# Altium PCB Booster_PA_OUT.PcbDoc (part 2 of 2)
Units mil, origin at the board's own origin, x right, y up, seen from the top; angles counter-clockwise.
Board outline 3129.92 x 1141.73 mil, 2 copper layers (Top Layer, Bottom Layer), stack 42.17 mil thick; 98 components, 62 nets, 277 pads, 322 vias.
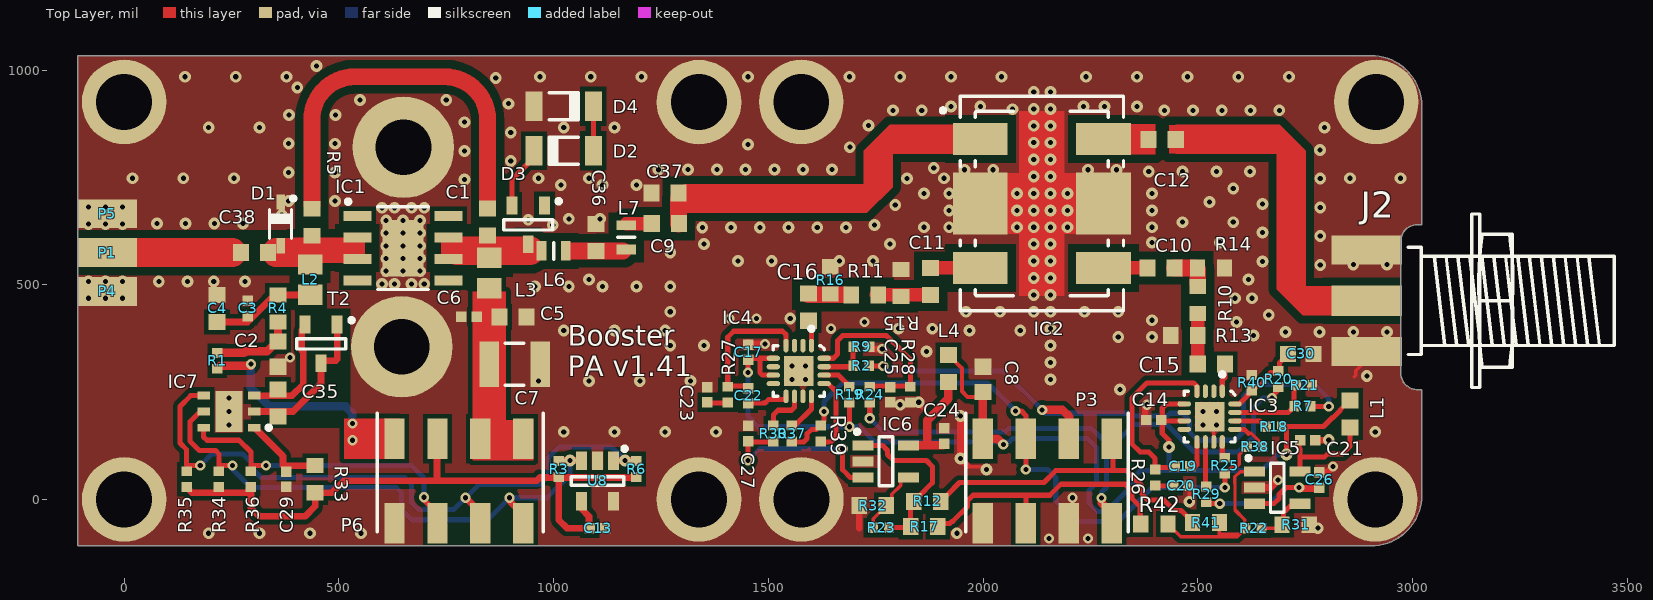
[diagram p0: Top Layer view]

## Via types
v1: diameter 27.56, hole 11.81, Top Layer to Bottom Layer, tented both sides, 283 vias
v2: diameter 23.62, hole 11.81, Top Layer to Bottom Layer, tented both sides, 39 vias

## Nets (pads, with @x,y where several pads share a name; then routed paths per layer and width w, separated by ;. In a path a pad name is that pad's centre, name@x,y a point inside that pad or via, vN(x,y) a via of type N, cw(c..) or ccw(c..) an arc to the next point about the centre after c; other vN are vias at no path point) (continued)
NetC22_1: (continued)
  Top Layer w11.81: C22.1@1452.76,224.41 1492.13,224.41 1500,232.28 1541.34,232.28 IC4.9@1541.34,242.13
NetC22_2: C22.2 IC4.4 R27.1 | length 333.8
  Top Layer w11.81: C22.2@1452.76,263.78 1405.51,263.78 1405.51,377.95 1419.29,391.73 1533.46,391.73 1541.34,383.86 IC4.4@1541.34,356.3
NetC23_1: C23.1 R27.2 | length 47.2
  Top Layer w11.81: C23.1@1358.27,224.41 R27.2@1405.51,224.41
NetC24_2: C24.2 IC6.5 L4.1 | length 257
  Top Layer w19.68: IC6.5@1820.87,125.98 1870.08,125.98 ; C24.2@1909.45,127.95 1907.48,125.98 1870.08,125.98 ; L4.1@1919.15,273.23 1919.15,234.49 1895.67,211.01 1895.67,209.76 1870.08,184.17 1870.08,125.98
NetC25_2: C25.2 IC4.16 R24.2 R28.1 | length 423.5
  Top Layer w11.81: IC4.16@1627.95,328.74 1651.57,328.74 1661.42,338.58 1661.42,370.08 1673.23,381.89 1774.36,381.89 1790.1,366.14 1791.34,366.14 1830.71,326.77 1830.71,263.78 1783.46,263.78 R24.2@1736.22,263.78
NetC26_2: C26.2 IC5.3 R29.1 | length 442.2
  Top Layer w11.81: R29.1@2519.68,-7.87 2521.65,-9.84 v2(2551.18,-9.84) ; IC5.3@2637.8,-9.84 2677.28,-9.84 2688.98,1.85 2688.98,11.28 2697.48,19.78 2697.53,19.78 2705.31,27.56 v2(2736.22,27.56) ; v2(2736.22,27.56) 2775.59,27.56 2779.53,23.62 2740.16,23.62 v2(2736.22,27.56)
  Bottom Layer w11.81: v2(2551.18,-9.84) 2667.91,-9.84 2705.31,27.56 v2(2736.22,27.56)
NetC27_2: C27.2 IC6.3 R30.1 | length 443.9
  Top Layer w11.81: v2(1452.76,90.55) 1452.76,133.86 R30.1@1511.81,133.86 ; v2(1673.22,118.11) 1673.22,68.9 1690.94,51.18 IC6.3@1726.38,51.18
  Bottom Layer w11.81: v2(1452.76,90.55) 1480.31,118.11 v2(1673.22,118.11)
NetC29_2: C29.2 IC7.1 R33.1 | length 191.5
  Top Layer w15.75: IC7.1@303.15,167.72 370.08,100.79 370.08,78.74 R33.1
NetC30_2: C30.2 IC3.16 R20.2 R40.1 | length 191.4
  Top Layer w11.81: IC3.16@2584.65,222.44 IC3.16 2596.46,222.44 R40.1@2629.92,255.91 ; R40.1@2625.98,255.91 R40.1@2629.92,255.91 ; R20.2@2685.04,298.79 2685.04,295.28 2669.29,295.28 2653.67,279.65 2653.67,273.77 2645.52,265.62 2639.64,265.62 R40.1@2629.92,255.91 ; R20.2 2690.85,302.63 2690.85,319.18 C30.2
NetC35_2: C35.2 IC7.3 T2.2 | length 263.7
  Top Layer w15.75: IC7.3@303.15,241.73 391.34,241.73 417.32,267.72 417.32,343.75 413.39,347.69 413.39,393.7 T2.2@421.26,401.57
NetC36_2: C36.2 L6.2 L7.1 | length 122.2
  Top Layer w39.37: 1039.37,578.88 1098.28,578.88 C36.2 1098.57,578.88 L7.1@1161.42,578.88
NetC38_1: C38.1 D1.2 IC1.2 IC1.3 L2.2 R5.1 | length 68.9
  Top Layer w66.93: D1.2@354.33,574.8 423.23,574.8
NetC38_2: C38.2 P1.1 | length 291.3
  Top Layer w66.93: P1.1 251.97,574.8
NetD2_1: D2.1 D3.2 | length 148.2
  Top Layer w11.81: D3.2 903.62,745.74 924.04,766.16 954.72,796.85 D2.1
NetD2_2: D2.2 D4.1 | length 103.7
  Top Layer w11.81: D2.2 D4.1
NetIC3_10: IC3.10 R29.2 | length 107.1
  Top Layer w11.81: R29.2@2517.72,31.5 IC3.10@2517.72,135.83 ; R29.2@2519.68,31.5 R29.2@2521.65,33.46
NetIC3_12: IC3.12 R25.2 | length 39.8
  Top Layer w11.81: IC3.12@2557.09,135.83 2557.09,104.33 R25.2@2562.99,98.43
NetIC3_13: IC3.13 R38.2 | length 86.7
  Top Layer w8: 2617.76,153.9 2624.92,153.9 2644.13,134.69 2644.13,129.84 R38.2
  Top Layer w11.81: IC3.13@2584.65,163.39 2608.27,163.39 2617.76,153.9
NetIC3_14: IC3.14 R18.2 | length 67.4
  Top Layer w11.81: IC3.14@2584.65,183.07 2643.7,183.07 R18.2@2649.61,177.17
NetIC3_15: IC3.15 R7.1 R21.2 | length 189.4
  Top Layer w11.81: IC3.15@2584.65,202.76 2710.63,202.76 2724.41,216.54 2724.41,258.27 R21.2@2725.98,259.84
NetIC4_10: IC4.10 R30.2 | length 107.7
  Top Layer w11.81: R30.2@1511.81,173.23 1511.81,196.85 1522.64,207.68 1554.13,207.68 1561.02,214.57 IC4.10@1561.02,242.13
NetIC4_12: IC4.12 R37.2 | length 88.3
  Top Layer w11.81: R37.2@1559.06,173.23 1562.99,173.23 1600.39,210.63 IC4.12@1600.39,242.13
NetIC4_13: IC4.13 R39.2 | length 183.5
  Top Layer w11.81: R39.2@1622.05,133.86 1645.67,133.86 1657.48,145.67 1657.48,251.97 1639.76,269.68 IC4.13@1627.95,269.68
NetIC4_14: IC4.14 R19.1 | length 71.6
  Top Layer w11.81: IC4.14@1627.95,289.37 1663.39,289.37 R19.1@1688.98,263.78
NetIC4_15: IC4.15 R2.1 R9.2 | length 109.7
  Top Layer w11.81: IC4.15@1627.95,309.06 1694.88,309.06 1696.85,311.02 1696.85,348.82 R9.2@1698.43,350.39
NetIC5_1: IC5.1 R22.1 R41.2 R42.2 | length 463.1
  Top Layer w8: R42.2 2430.5,-58.97 2444.21,-72.69 2446.18,-72.69 2460.11,-86.61 2591.73,-86.61 2597.33,-81.02 ; R41.2 2550.5,-81.02 2597.33,-81.02 ; IC5.1@2637.8,64.96 IC5.1 2598.72,64.96 2586.61,52.86 2586.61,37.61 2586.8,37.42 2586.8,-24.62 2609.6,-47.41 2609.6,-65.11 R22.1 2611.42,-67.72 2604,-75.13 2603.21,-75.13 2597.33,-81.02
NetIC5_4: IC5.4 R22.2 R31.2 | length 120.8
  Top Layer w8: R22.2 2688.57,-66.93 R31.2
  Top Layer w11.81: R31.2@2699.98,-59 2699.98,-30.34 2720.47,-9.84 IC5.4@2732.28,-9.84
NetIC6_1: IC6.1 R12.1 R17.1 R23.1 | length 413.5
  Top Layer w11.81: IC6.1@1726.38,125.98 1765.75,125.98 1777.56,114.17 1777.56,104.87 1791.87,90.55 1868.11,90.55 1881.89,76.77 1881.89,38.98 1852.36,9.45 1850.39,9.45 1838.58,-2.36 R12.1 1831.56,-11.35 R17.1@1831.56,-53.37 ; R23.1 1828.98,-65.67 R17.1 R17.1@1831.56,-53.37 ; R17.1@1821.97,-62.96 R17.1@1831.56,-53.37 ; R17.1@1833.78,-49.18 1833.78,-51.15 R17.1@1831.56,-53.37
NetIC6_4: IC6.4 R23.2 R32.2 | length 161.5
  Top Layer w8: R23.2 1743.95,-45.11 1759.14,-29.93 1761.11,-29.93 1774.82,-16.21 R32.2 1787.27,-1.79 1787.27,11.68 1808.08,32.49 1808.08,43.37 1815.89,51.18 IC6.4
  Top Layer w11.81: R32.2@1763.01,-14.24 R32.2@1764.98,-12.27
OUT_BIAS: P6.8 R1.2 | length 566.2
  Top Layer w19.68: R1.2 217.32,304.33 224.02,311.02 v2@295.28,311.02 ; v2(531.5,177.17) v2(531.5,137.8) 598.03,137.8
  Bottom Layer w19.68: v2(295.28,314.96) 295.28,259.84 338.58,216.54 515.75,216.54 531.5,200.79 v2(531.5,177.17) v2(531.5,137.8)
P3V3: C13.2 P6.6 R3.1 R6.1 R33.2 R34.1 R35.1 R36.1 U8.4 | length 1493.9
  Top Layer w15.75: R35.1@145.67,27.56 157.48,15.75 295.28,15.75 295.28,-19.69 314.96,-39.37 421.26,-39.37 444.88,-15.75 R33.2 484.25,15.75 511.81,43.31 728.35,43.31 ; P6.6@728.35,137.8 728.35,43.31 ; U8.4 1064.96,-21.65 1082.68,-39.37 1082.68,-66.93 1031.5,-66.93 1011.81,-47.24 R3.1@1011.81,51.18 ; R6.1@1192.91,51.18 R3.1@1011.81,51.18 ; 728.35,43.31 960.63,43.31 968.5,51.18 R3.1@1011.81,51.18
P3V3A: C8.2 C14.2 C17.2 IC3.5 IC3.7 IC4.5 IC4.7 L1.2 L4.2 P3.8 R18.1 R19.2 | length 2665
  Top Layer w10: L4.2@1919.15,337.01 1950.96,305.2 1950.96,251.8 1963.98,238.78 1999.61,238.78 C8.2@2000,239.17
  Top Layer w11.81: v2(1452.76,295.28) C17.2 1452.76,326.77 1454.72,328.74 1480.32,328.74 ; IC4.7@1513.78,289.37 IC4.7 1486.22,289.37 1480.32,295.28 1480.32,328.74 ; IC4.5@1513.78,328.74 IC4.5 1480.32,328.74 ; v2(1688.98,169.29) R19.2@1688.98,224.41 ; v1(2433.07,122.05) 2433.07,137.8 2417.32,153.54 C14.2@2417.32,185.04 ; IC3.7@2470.47,183.07 IC3.7 2419.29,183.07 C14.2@2417.32,185.04 ; IC3.5@2470.47,222.44 IC3.5 2427.17,222.44 2417.32,212.6 C14.2@2417.32,185.04 ; v1(2706.69,104.33) 2706.69,159.45 2696.85,169.29 2697.24,169.68 2792.91,169.68 2814.05,190.82 2815.77,190.82 2830.83,205.88 2830.83,207.61 2854.33,231.1 L1.2@2854.33,222.33
  Top Layer w19.68: C8.2@1999.61,238.78 P3.8 2033.46,141.73 v2(2047.24,127.95)
  Bottom Layer w11.81: v2(1452.76,295.28) 1452.76,192.91 1476.38,169.29 v2(1688.98,169.29) 1712.6,169.29 1748.03,133.86 2060.97,133.86 2068.84,141.73 2243.13,141.73 2263.78,121.09 2263.78,37.74 2246.46,20.42 2246.46,-8.69 2265.33,-27.56 2287.4,-27.56 2350.39,35.43 2350.39,51.18 2366.14,66.93 2433.07,66.93 ; v1(2433.07,122.05) 2433.07,66.93 ; v1(2706.69,104.33) 2685.04,104.33 2647.64,66.93 2433.07,66.93
RET_VRMS: P3.2 R12.2 R41.1 | length 755.3
  Top Layer w11.81: R12.2 1901.57,-2.36 1913.39,9.45 1915.35,9.45 1945.28,39.37 2141.73,39.37 2169.29,66.93 2303.15,66.93 ; P3.2 2303.15,138.19 2303.15,66.93 ; R41.1 2487.5,-52.03 2460.88,-25.41 2445.29,-25.41 2421.59,-1.7 2384.13,-1.7 2370.08,12.35 2370.08,31.5 2334.65,66.93 2303.15,66.93
SCK: IC7.4 P6.3 R6.2 R35.2 U8.1 | length 1531.7
  Top Layer w11.81: v2(177.17,78.74) 145.67,78.74 145.67,115.68 129.92,131.43 129.92,216.54 155.12,241.73 IC7.4@185.04,241.73
  Top Layer w15.75: v2@798.03,1.18 P6.3@834.65,-35.43 ; U8.1 v1(1166.34,90.55) R6.2@1192.91,90.55
  Bottom Layer w11.81: v2(177.17,78.74) 204.72,106.3 275.59,106.3 299.21,82.68 299.21,70.87 318.9,51.18 653.54,51.18 669.29,35.43 669.29,-7.87 685.04,-23.62 767.72,-23.62 v2(795.28,3.94) 826.77,35.43 968.5,35.43 988.19,55.12 988.19,98.43 1011.81,122.05 1134.84,122.05 v1(1166.34,90.55)
SDA: IC7.5 P6.1 R3.2 R34.2 U8.3 | length 1283.9
  Top Layer w11.81: IC7.5 177.17,204.72 153.54,181.1 153.54,135.83 175.2,114.17 212.6,114.17 220.47,106.3 220.47,78.74 v2(251.97,78.74)
  Top Layer w15.75: v2(897.64,3.94) 898.03,3.54 898.03,-4.33 P6.1@937.01,-43.31 ; R3.2@1011.81,90.55 v1(1038.39,90.55) U8.3
  Bottom Layer w11.81: v2(251.97,78.74) 251.97,70.87 295.28,27.56 633.86,27.56 645.67,15.75 645.67,-23.62 669.29,-47.24 846.46,-47.24 v2(897.64,3.94) 984.25,3.94 1038.39,58.07 v1(1038.39,90.55)
VCC_PWRAMP: C5.2 C6.2 C7.2 L3.2 P6.2 P6.4
pads on no net: D3.1 IC1.1 IC1.4 IC1.5 IC1.8 IC3.2 IC3.3 IC3.6 IC3.8 IC4.2 IC4.3 IC4.6 IC4.8

## Polygon pours and split planes (outlines as drawn)
GND on Bottom Layer "GND_BOTTOM" (solid, remove dead copper, pour order 0): -108.27,-108.27 -108.27,1033.46 2903.54,1033.46 cw(c2903.54,915.35) 3021.65,915.35 3021.65,610.24 3011.81,610.24 ccw(c3011.81,570.87) 2972.44,570.87 2972.44,295.28 ccw(c3011.81,295.28) 3011.81,255.91 3021.65,255.91 3021.65,9.84 cw(c2903.54,9.84) 2903.54,-108.27
GND on Top Layer "GND_TOP" (solid, remove dead copper, pour order 2): -108.27,-108.27 -108.27,1033.46 2903.54,1033.46 cw(c2903.54,915.35) 3021.65,915.35 3021.65,610.24 3011.81,610.24 ccw(c3011.81,570.87) 2972.44,570.87 2972.44,295.28 ccw(c3011.81,295.28) 3011.81,255.91 3021.65,255.91 3021.65,9.84 cw(c2903.54,9.84) 2903.54,-108.27

## Other copper
Top Layer:
  rectangle net NetC12_1: 2433.07,805.12 2448.82,872.05
  rectangle net VCC_PWRAMP: 811.02,90.55 952.76,185.04
  rectangle net OUT_BIAS: 511.81,94.49 641.73,188.98
  rectangle net NetC12_2: 2326.77,803.15 2401.57,874.02
  rectangle net NetC38_1: 385.83,551.18 561.02,610.24
  region net NetC1_2: 877.95,610.24 738.19,610.24 738.19,551.18 877.95,551.18
  rectangle net VCC_PWRAMP: 811.02,90.55 889.76,484.25
  pour cut-out: 905.51,517.72 905.51,523.62 ccw(c877.95,523.62) 877.95,551.18 826.77,551.18 ccw(c826.77,511.81) 787.4,511.81
  pour cut-out: 2972.44,551.18 2972.44,600.39 cw(c3011.81,600.39) 3011.81,639.76 3021.65,639.76 3021.65,551.18
  region net NetC12_1: 2751.16,811.81 2751.16,805.12 2751.16,496.06 2893.7,496.06 2893.7,429.13 2751.16,429.13 2744.47,429.13 2684.23,489.37 2684.23,496.06 2684.23,805.12 2448.82,805.12 2448.82,872.05 2690.92,872.05
  pour cut-out: 295.28,165.35 527.56,165.35 527.56,444.88 468.5,444.88 468.5,362.2 433.07,362.2 433.07,259.84 295.28,259.84
  region net NetC9_2: 1996.06,805.51 1789.37,805.51 1789.37,727.56 1729.13,667.32 1303.15,667.32 1303.15,734.25 1722.44,734.25 1722.44,805.51 1722.44,812.2 1782.68,872.44 1996.06,872.44
  pour cut-out: 251.97,628.41 362.2,628.41 362.2,521.19 251.97,521.19
Bottom Layer:
  pour cut-out: 2972.44,551.18 2972.44,600.39 cw(c3011.81,600.39) 3011.81,639.76 3021.65,639.76 3021.65,551.18

## Silkscreen, mask and mechanical layers (free items; w line width, h text height)
Top Overlay:
  text "Booster  / PA v1.41" at 1033.46,287.4 h47.24
Bottom Overlay:
  rectangle: 2783.46,110.24 2834.65,291.34
  rectangle: 2342.52,-31.5 2811.02,291.34
  region: 1407.48,177.17 1407.48,84.65 1433.07,59.06 1480.31,59.06 1507.87,86.61 1507.87,149.61
  region: 1407.48,324.8 1407.48,177.17 1480.31,104.33 1677.17,104.33 1742.13,39.37 1820.87,-39.37 2194.88,-39.37 2224.41,-68.9 2421.26,-68.9 2470.47,-19.68 2470.47,196.85 2293.31,374.02 1456.69,374.02
  region: 127.95,29.53 246.06,-88.58 1200.79,-88.58 1200.79,137.8 649.61,137.8 383.86,403.54 196.85,403.54 127.95,334.65
Bottom Solder:
  rectangle: 1350.39,-118.11 1586.61,51.18
  rectangle: 2824.8,-118.11 3051.18,314.96
  rectangle: 1220.47,-118.11 1377.95,472.44
  rectangle: 59.06,452.76 3051.18,1092.52
  rectangle: 2500,295.28 3051.18,1092.52
  rectangle: -147.64,-147.64 98.43,1092.52
  region: 501.97,472.44 501.97,314.96 659.45,157.48 1255.91,157.48 1255.91,500 1220.94,534.96
Mechanical 1:
  drawing of 204 lines, arcs and shapes, not listed
  text "Layer" at -522.89,-352.82 h60
  text "Name" at -112.98,-352.82 h60
  text "Material" at 816.76,-352.82 h60
  text "Thickness" at 1676.53,-352.82 h60
  text "Constant" at 2326.37,-352.82 h60
  text "Board Layer Stack" at 2896.23,-352.82 h60
  text "Top Overlay" at -112.98,-472.82 h60
  text "Top Solder" at -112.98,-592.82 h60
  text "Solder Resist" at 816.76,-592.82 h60
  text "0.010mm" at 1676.53,-592.82 h60
  text "3.5" at 2326.37,-592.82 h60
  text "1" at -522.89,-712.82 h60
  text "Top Layer" at -112.98,-712.82 h60
  text "Copper" at 816.76,-712.82 h60
  text "0.036mm" at 1676.53,-712.82 h60
  text "Dielectric 1" at -112.98,-832.82 h60
  text "FR408" at 816.76,-832.82 h60
  text "1.000mm" at 1676.53,-832.82 h60
  text "3.67" at 2326.37,-832.82 h60
  text "2" at -522.89,-952.82 h60
  text "Bottom Layer" at -112.98,-952.82 h60
  text "Copper" at 816.76,-952.82 h60
  text "0.036mm" at 1676.53,-952.82 h60
  text "Bottom Solder" at -112.98,-1072.82 h60
  text "Solder Resist" at 816.76,-1072.82 h60
  text "0.010mm" at 1676.53,-1072.82 h60
  text "3.5" at 2326.37,-1072.82 h60
  text "Bottom Overlay" at -112.98,-1192.82 h60